# Altium PCB Шувалова.pcbdoc
Units mm, origin at the board's own origin, x right, y up, seen from the top; angles counter-clockwise.
Board outline 43.75 x 58.75 mm, 2 copper layers (Top Layer, Bottom Layer); 32 components, 20 nets, 153 pads, 30 vias.
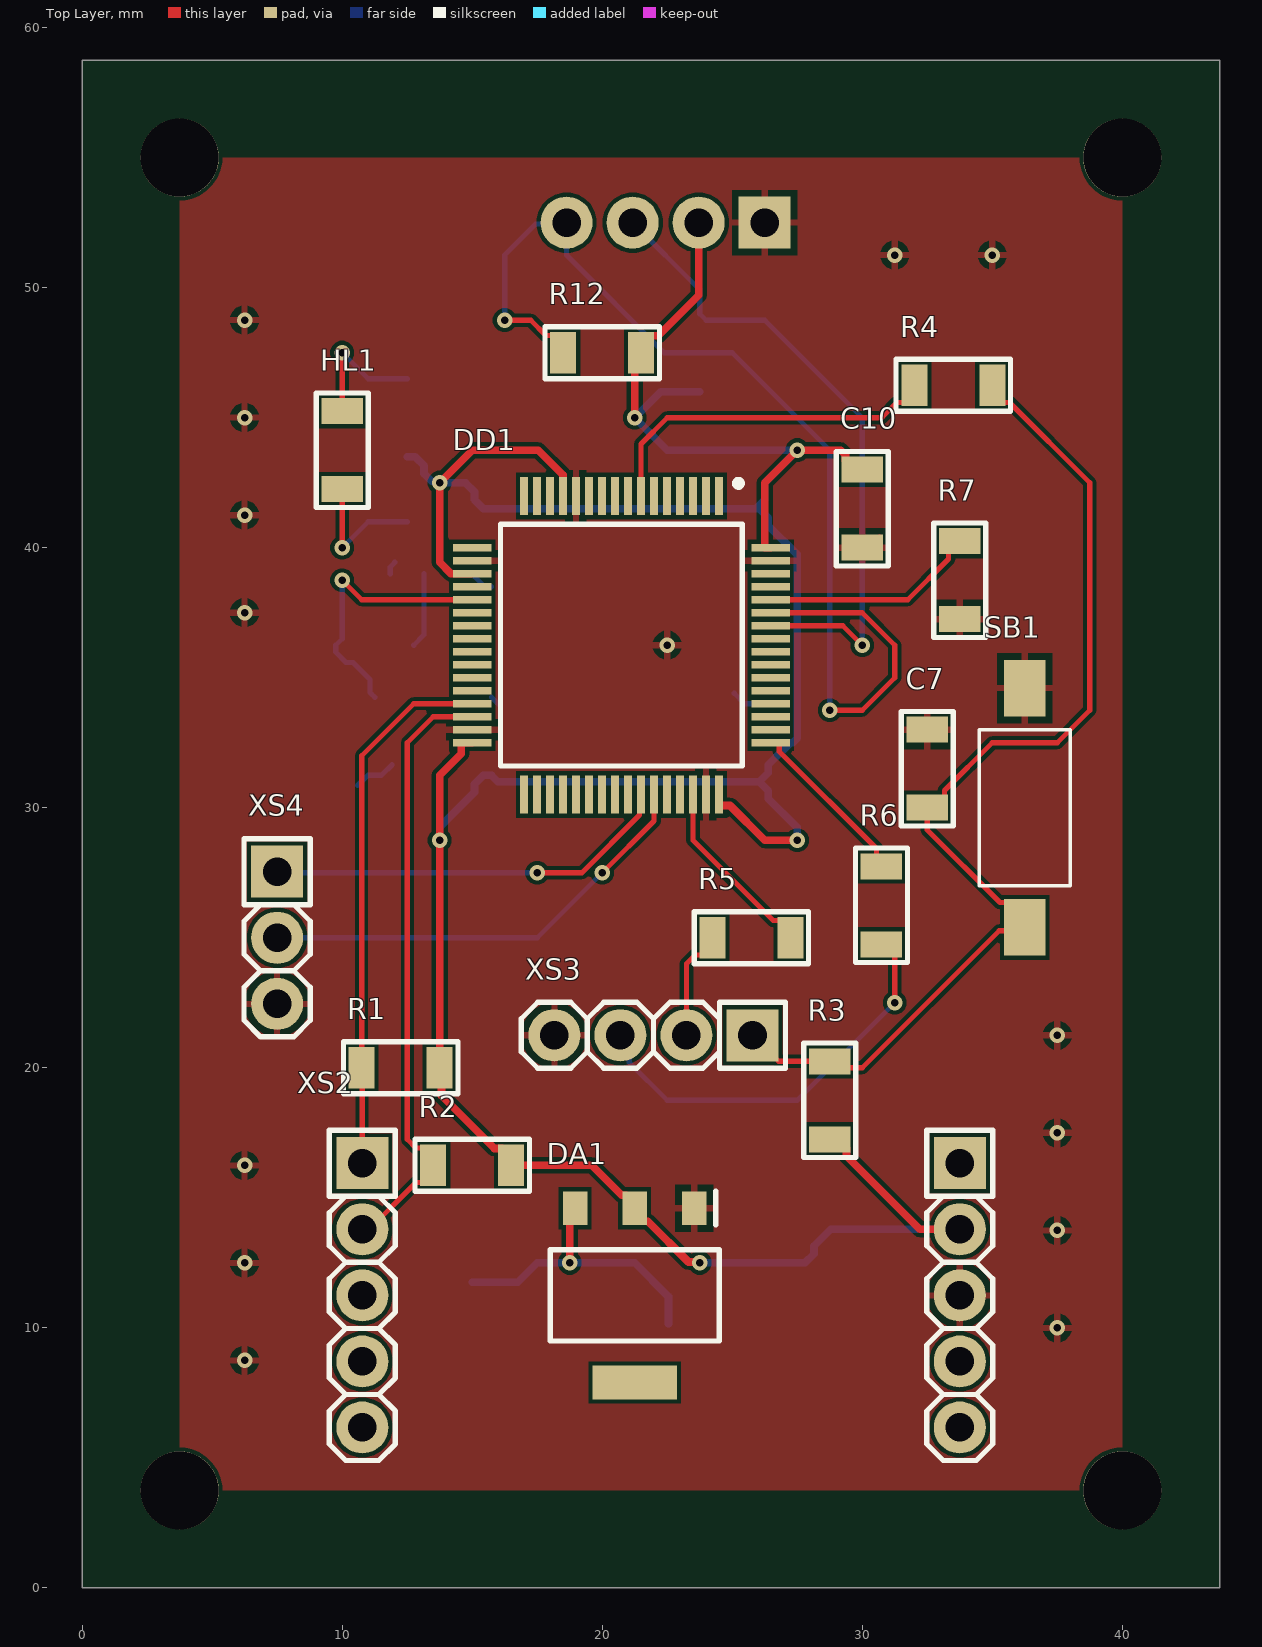
[diagram p0: Top Layer view]
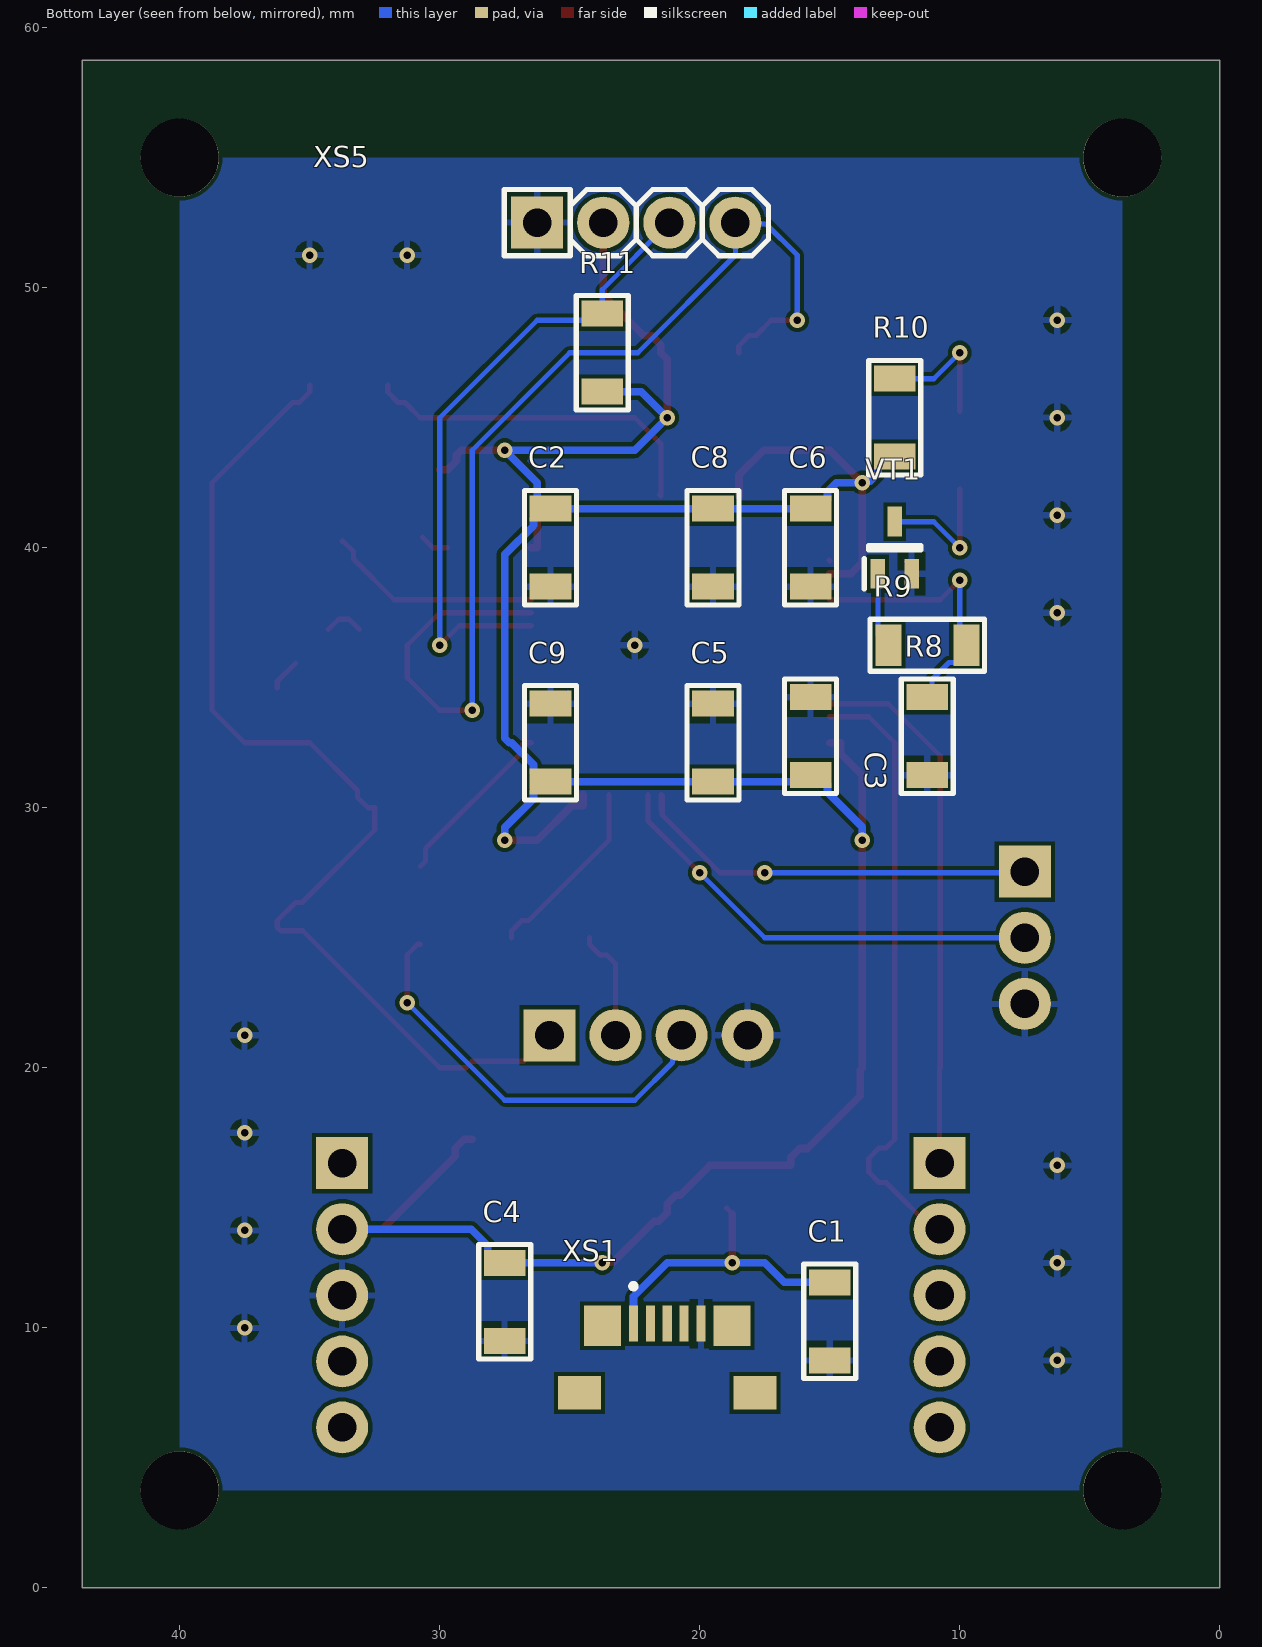
[diagram p1: Bottom Layer view, seen from below]
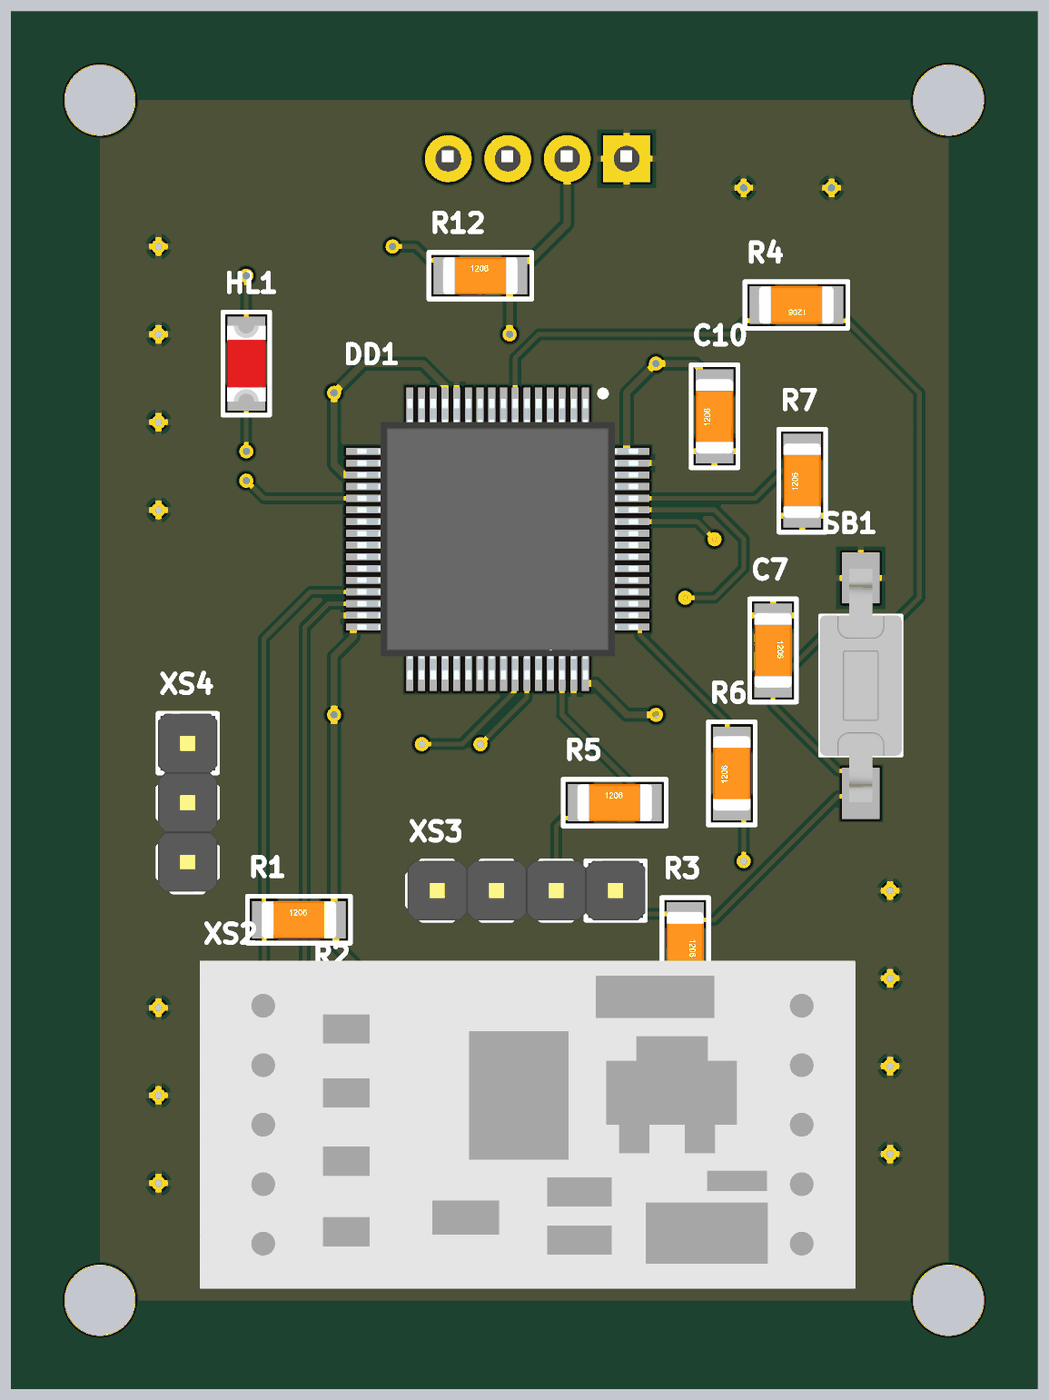
[diagram p2: 3D render of the assembled board from above, using the file's embedded part models]
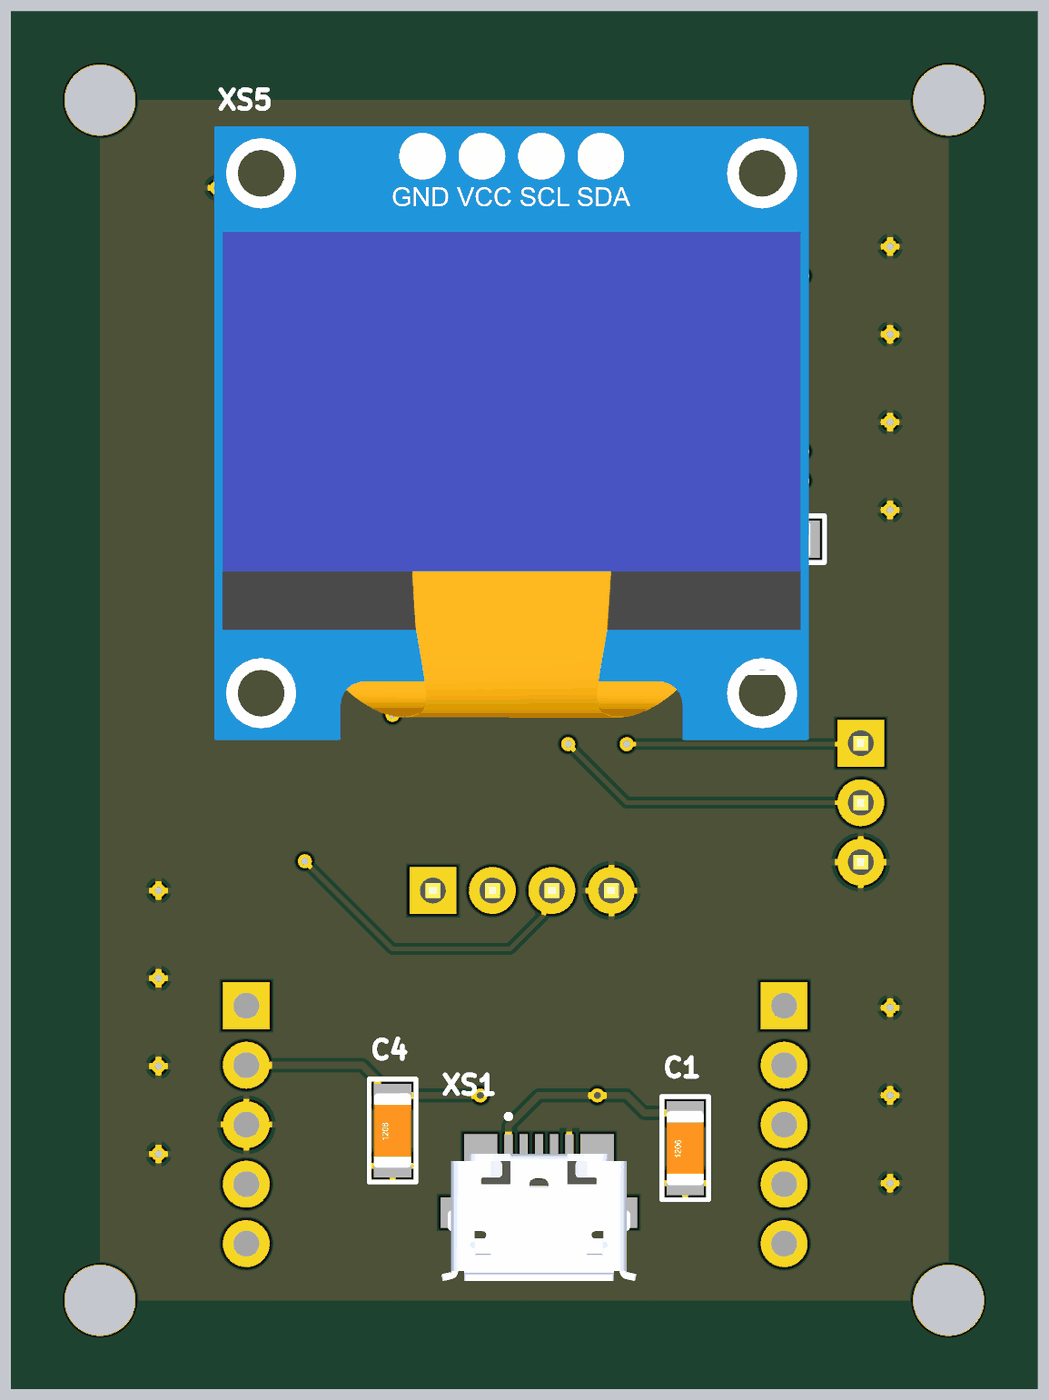
[diagram p3: 3D render of the assembled board from below, using the file's embedded part models]

## Layer stack, top to bottom
Top Solder: solder mask 0.0102, Solder Resist, Dk 3.5
Top Layer: signal copper 0.0356
Dielectric 1: dielectric 0.32, FR-4, Dk 4.8
Bottom Layer: signal copper 0.0356
Bottom Solder: solder mask 0.0102, Solder Resist, Dk 3.5

## Board outline
0,0 43.75,0 43.75,58.75 0,58.75

## Design rules (kind name [scope] priority, off if disabled: settings)
Clearance [All] p1: gap=0.15 ignorepadtopadclearanceinfootprint=TRUE
PolygonConnect [All] p1: thpad.connectstyle=Relief thpad.reliefconductorwidth=0.254 thpad.reliefentries=4 thpad.polygonreliefangle="90 Angle" thpad.airgapwidth=0.254 smdpad.connectstyle=Relief smdpad.reliefconductorwidth=0.254 smdpad.reliefentries=4 smdpad.polygonreliefangle="90 Angle" smdpad.airgapwidth=0.254 via.connectstyle=Direct via.reliefconductorwidth=0.254 via.reliefentries=4 via.polygonreliefangle="90 Angle" via.airgapwidth=0.254
RoutingVias [All] p1: holewidth=0.3 width=0.6 viastyle="Through Hole" minholewidth=0.3 minwidth=0.6 maxholewidth=0.3 maxwidth=0.6
SolderMaskExpansion [All] p1: expansion=0.102 istentingtop=FALSE
UnRoutedNet [All] p1: checkbadconnections=TRUE
Width [All] p1: maxlimit=0.5 minlimit=0.15 preferedwidth=0.2
29 further rules are at their usual default settings.

## Components (designator, comment, footprint, x,y, rotation, side; value= is the part's Value field where it differs from the comment)
C1 "*" "CAP: 1206" 15,10.25 r90 bottom
C2 "C" "CAP: 1206" 25.738,40 r90 bottom
C3 "C" "CAP: 1206" 15.738,32.75 r270 bottom
C4 "*" "CAP: 1206" 27.5,11 r90 bottom
C5 "C" "CAP: 1206" 19.488,32.5 r270 bottom
C6 "C" "CAP: 1206" 15.738,40 r90 bottom
C7 "C" "CAP: 1206" 32.5,31.5 r270 top
C8 "C" "CAP: 1206" 19.488,40 r90 bottom
C9 "C" "CAP: 1206" 25.738,32.5 r270 bottom
C10 "C" "CAP: 1206" 30,41.5 r90 top
DA1 "AMS1117" AMS1117-3.3 21.25,11.25 r270 top
DD1 "STM32F103RBT6" STM32F103RBT6 20.738,36.25 r270 top net-tie
HL1 "LED" "LED: 1206" 10,43.75 r270 top
R1 "R" "CAP: 1206" 12.25,20 r0 top
R2 "R" "CAP: 1206" 15,16.25 r0 top
R3 "R" "CAP: 1206" 28.75,18.75 r270 top
R4 "R" "CAP: 1206" 33.5,46.25 r180 top
R5 "R" "CAP: 1206" 25.738,25 r0 top
R6 "R" "CAP: 1206" 30.738,26.25 r90 top
R7 "R" "CAP: 1206" 33.75,38.75 r90 top
R8 "R" "CAP: 1206" 11.25,32.75 r90 bottom
R9 "R" "CAP: 1206" 11.25,36.25 r0 bottom
R10 "R" "CAP: 1206" 12.5,45 r270 bottom
R11 "R" "CAP: 1206" 23.75,47.5 r270 bottom
R12 "R" "CAP: 1206" 20,47.5 r0 top
SB1 "Button" Button_1437566-3 36.25,30 r270 top
VT1 "BC847" VT 12.5,40 r90 bottom
XS1 "" "USB B 47346-0001" 21.25,7.5 r180 bottom
XS2 "" ADXL345 21.525,10.75 r0 top
XS3 "" "CON: PLS-4" 21.968,21.25 r180 top
XS4 "" "CON: PLS-3" 7.5,25 r270 top
XS5 "" ssd1306 22.44,52.5 r180 bottom

## Footprints (in the part's own frame and the unit in brackets; to place one, negate y for a bottom-side part, rotate by r counter-clockwise, add the part's x,y. Pads: shape width x height; smd on the part's side, far side on the other; paste and mask are expansions set on the pad)
ADXL345 [mm]
  round 2 hole 1.1: 3V3(12.225,3.04) CS(12.225,-4.58) GND(12.225,0.5) IN1(-10.75,-4.58) IN2(-10.75,-2.04) SDA(-10.75,3.04) SDO(-10.75,0.5) VS(12.225,-2.04)
  rect 2x2 hole 1.1: 5V(12.225,5.58) SCL(-10.75,5.58)
  silkscreen extent -12.02,-5.85 13.49,6.85, body extent -13.5,-6.5 14.5,7.5, height 6
AMS1117-3.3 [mm]
  rect 1.3x0.95 smd: 1(-3.35,2.29) 2(-3.35,0) 3(-3.35,-2.29)
  rect 1.3x3.25 smd: 4(3.35,0)
  silkscreen extent -4,-3.25 1.75,3.25, body extent -3.5,-3.25 3.5,3.25, height 1.8
Button_1437566-3 [mm]
  rect 2.18x1.6 smd: 1(-4.6,0) 2(4.6,0)
  silkscreen extent -3,-1.75 3,1.75, body extent -4.98,-1.75 4.98,1.75, height 4.4
"CAP: 1206" [mm]
  rect 1x1.6 smd: 1(-1.5,0) 2(1.5,0)
  silkscreen extent -2.2,-1 2.2,1, body extent -1.6,-0.8 1.6,0.8, height 1
"CON: PLS-3" [mm]
  round 2 hole 1.1: GND(2.54,0) RXD(0,0)
  rect 2x2 hole 1.1: TXD(-2.54,0)
  silkscreen extent -3.81,-1.27 3.81,1.27, body extent -3.81,-1.27 3.81,1.27, height 8.54
"CON: PLS-4" [mm] "PLS-40 4 pin header"
  round 2 hole 1.1: GND(3.81,0) SWCLK(1.27,0) SWDIO(-1.27,0)
  rect 2x2 hole 1.1: NRST(-3.81,0)
  silkscreen extent -5.08,-1.27 5.08,1.27, body extent -5.08,-1.27 5.08,1.27, height 8.54
"LED: 1206" [mm]
  rect 1x1.6 smd: 1(-1.5,0) 2(1.5,0)
  silkscreen extent -2.2,-1 2.2,1, body extent -1.64,-0.82 1.64,0.82, height 0.9
ssd1306 [mm] "PLS-40 4 pin header"
  rect 2x2 hole 1.1: GND(-3.81,0)
  round 2 hole 1.1: SCL(1.27,0) SDA(3.81,0) VCC(-1.27,0)
  silkscreen extent -5.08,-1.27 5.08,1.27, body extent -12.68,-24.83 12.72,1.37, height 6.3
STM32F103RBT6 [mm]
  rect 1.475x0.3 smd: 1(-5.738,3.75) 2(-5.738,3.25) 3(-5.738,2.75) 4(-5.738,2.25) 5(-5.738,1.75) 6(-5.738,1.25) 7(-5.738,0.75) 8(-5.738,0.25) 9(-5.738,-0.25) 10(-5.738,-0.75) 11(-5.738,-1.25) 12(-5.738,-1.75) 13(-5.738,-2.25) 14(-5.738,-2.75) 15(-5.738,-3.25) 16(-5.738,-3.75) 33(5.738,-3.75) 34(5.738,-3.25) 35(5.738,-2.75) 36(5.738,-2.25) 37(5.738,-1.75) 38(5.738,-1.25) 39(5.738,-0.75) 40(5.738,-0.25) 41(5.738,0.25) 42(5.738,0.75) 43(5.738,1.25) 44(5.738,1.75) 45(5.738,2.25) 46(5.738,2.75) 47(5.738,3.25) 48(5.738,3.75)
  rect 0.3x1.475 smd: 17(-3.75,-5.738) 18(-3.25,-5.738) 19(-2.75,-5.738) 20(-2.25,-5.738) 21(-1.75,-5.738) 22(-1.25,-5.738) 23(-0.75,-5.738) 24(-0.25,-5.738) 25(0.25,-5.738) 26(0.75,-5.738) 27(1.25,-5.738) 28(1.75,-5.738) 29(2.25,-5.738) 30(2.75,-5.738) 31(3.25,-5.738) 32(3.75,-5.738) 49(3.75,5.738) 50(3.25,5.738) 51(2.75,5.738) 52(2.25,5.738) 53(1.75,5.738) 54(1.25,5.738) 55(0.75,5.738) 56(0.25,5.738) 57(-0.25,5.738) 58(-0.75,5.738) 59(-1.25,5.738) 60(-1.75,5.738) 61(-2.25,5.738) 62(-2.75,5.738) 63(-3.25,5.738) 64(-3.75,5.738)
  silkscreen extent -6.35,-4.65 4.65,4.65, body extent -6,-6 6,6, height 1.6
"USB B 47346-0001" [mm]
  rect 0.35x1.38 smd: 1(-1.3,2.66) 4(0.65,2.66) 5(1.3,2.66) D+(0,2.66) D-(-0.65,2.66)
  rect 1.425x1.55 smd: S1(-2.488,2.575) S2(2.488,2.575)
  rect 1.65x1.3 smd: S3(-3.375,0) S4(3.375,0)
  silkscreen extent -1.4,4 -1.2,4.2, body extent -4.18,-2.93 4.18,2.5, height 2.7
VT [mm]
  rect 1.15x0.55 smd: 1(-1,0.65) 2(-1,-0.65) 3(1,0)
  silkscreen extent -1.58,-1 0.08,1.17, body extent -1.1,-1 1.1,1, height 1

## Part data
C1 C4: library part "C Polar"
XS1: library part USB-B, Txt1=+5V, Txt2=GND
XS2: library part ADXL345, Txt1=VDD, Txt2=SCL, Txt3=SDA, Txt4=GND
XS3: library part STLINK, Txt1=NRST, Txt2=SWDIO, Txt3=SWCLK, Txt4=GND
XS4: library part UART, Txt1=TXD, Txt2=RXD, Txt3=GND
XS5: library part DISPLAY, Txt1=VCC, Txt2=SDA, Txt3=SCL, Txt4=GND

## Free pads (board coordinates)
  round 3 hole 3: 1(3.75,55) 2(40,55) 3(3.75,3.75) 4(40,3.75)

## Via types
v1: diameter 0.6, hole 0.3, Top Layer to Bottom Layer, 30 vias

## Nets (pads, with @x,y where several pads share a name; then routed paths per layer and width w, separated by ;. In a path a pad name is that pad's centre, name@x,y a point inside that pad or via, vN(x,y) a via of type N, cw(c..) or ccw(c..) an arc to the next point about the centre after c; other vN are vias at no path point)
3V3: C2.2 C3.2 C4.2 C5.2 C6.2 C8.2 C9.2 C10.2 DA1.2 DD1.13 DD1.19 DD1.32 DD1.48 DD1.64 R1.2 R2.2 R3.2 R10.2 R11.2 R12.2 XS2.3V3 XS5.VCC | length 131.2
  Top Layer w0.3: DD1.32 14.576,32.5 14.576,32.076 13.75,31.25 v1(13.75,28.75) R1.2 13.824,19.926 13.824,18.926 15.85,16.9 16.15,16.9 16.5,16.55 R2.2 19.6,16.25 20.75,15.1 20.925,15.1 21.25,14.775 DA1.2 21.25,14.425 21.575,14.1 21.75,14.1 23.32,12.53 23.72,12.53 v1(23.75,12.5) ; DD1.19 14.188,39 13.75,39.438 v1(13.75,42.5) 15,43.75 17.538,43.75 18.488,42.8 DD1.13 ; v1(21.25,45) 21.25,47.25 R12.2 21.5,47.8 21.85,48.15 22.15,48.15 23.71,49.71 XS5.VCC ; DD1.48 24.488,30.088 24.912,30.088 26.25,28.75 v1(27.5,28.75) ; DD1.64 26.25,40 26.25,42.5 v1(27.5,43.75) 29.174,43.75 29.35,43.574 29.35,43.35 29.7,43 C10.2 ; R3.2 29.05,17.25 29.4,16.9 29.4,16.6 32.21,13.79 XS2.3V3
  Bottom Layer w0.3: R10.2 12.8,43.5 13.15,43.15 13.15,42.85 13.443,42.557 ; v1(13.75,28.75) 13.75,29.262 15.088,30.6 15.088,30.9 15.438,31.25 C3.2 15.988,31 C5.2 C9.2 C9.2@26.038,31 ; v1(13.75,42.5) 14.738,42.5 15.088,42.15 15.088,41.85 15.438,41.5 C6.2 C8.2 C2.2 C2.2@25.9,41.5 ; v1(23.75,12.5) C4.2 27.8,12.5 28.15,12.85 28.15,13.15 28.79,13.79 XS2.3V3 ; R11.2 22.25,46 v1(21.25,45) 22.5,43.75 v1(27.5,43.75) 26.25,42.5 26.25,41.85 C2.2@25.9,41.5 ; v1(27.5,28.75) 27.5,29.238 26.388,30.35 26.388,30.65 C9.2@26.038,31 ; C2.2@25.9,41.5 26.038,41.5 26.388,41.15 26.388,40.85 27.5,39.738 27.5,32.676 27.324,32.5 27.238,32.5 26.388,31.65 26.388,31.35 C9.2@26.038,31
GND: C1.1 C2.1 C3.1 C4.1 C5.1 C6.1 C7.1 C8.1 C9.1 C10.1 DA1.1 DD1.12 DD1.18 DD1.31 DD1.47 DD1.63 R7.1 R8.1 SB1.1 VT1.2 XS1.5 XS2.GND XS3.GND XS4.GND XS5.GND | length 8.1
  Top Layer w0.2: DD1.18 DD1.18@15.024,39.524 ; C10.1@29.7,40 C10.1 30.262,40 C10.1@30.662,40.4 ; R7.1@33.088,36.85 33.488,37.25 R7.1 33.883,37.25 R7.1@34.283,36.85 ; SB1.1@35.55,35.557 36.25,34.857 SB1.1
  Bottom Layer w0.2: R8.1@10.588,30.85 10.988,31.25 R8.1 11.512,31.25 R8.1@11.912,31.65 ; VT1.2 11.85,39.262 VT1.2@12.025,39.437 ; C6.1@15.076,38.9 15.476,38.5 C6.1 ; C3.1 C3.1@15.988,34 ; C9.1@25.076,34.4 25.476,34 C9.1
  other v1: 6.25,8.75 37.5,10 6.25,12.5 37.5,13.75 6.25,16.25 37.5,17.5 37.5,21.25 22.5,36.25 6.25,37.5 6.25,41.25 6.25,45 6.25,48.75 31.25,51.25 35,51.25
NetC1_2: C1.2 DA1.3 XS1.1 | length 11.6
  Top Layer w0.2: DA1.3@18.75,14.39 DA1.3
  Top Layer w0.3: v1(18.75,12.5) DA1.3@18.75,14.39
  Bottom Layer w0.3: C1.2 16.75,11.75 17.5,12.5 v1(18.75,12.5) 21.25,12.5 22.55,11.2 XS1.1
NetC7_2: C7.2 R3.1 R4.1 SB1.2 XS3.NRST | length 41.7
  Top Layer w0.2: XS3.NRST 26.778,20.25 R3.1 29,20 30,20 35.267,25.267 36.117,25.267 SB1.2 36.25,25.657 35.55,26.357 35.293,26.357 32.5,29.15 C7.2 32.762,30 33.162,30.4 33.162,30.662 35,32.5 37.5,32.5 38.75,33.75 38.75,42.5 35.662,45.588 35.4,45.588 35,45.988 R4.1
NetDD1_7: DD1.7 R4.2 | length 13.7
  Top Layer w0.2: DD1.7@21.538,42.038 DD1.7 21.488,43.988 22.5,45 30.75,45 31.338,45.588 31.6,45.588 32,45.988 R4.2
NetDD1_21: DD1.21 R8.2 R9.1 | length 10.7
  Top Layer w0.2: v1(10,38.75) 10.75,38 DD1.21
  Bottom Layer w0.2: v1(10,38.75) 10,36.5 R9.1 9.75,35.988 10.15,35.588 10.412,35.588 11.067,34.933 11.067,34.433 R8.2
NetDD1_29: DD1.29 R1.1 XS2.SCL | length 20.8
  Top Layer w0.2: XS2.SCL 10.775,19.975 R1.1 10.75,32 12.75,34 DD1.29
NetDD1_30: DD1.30 R2.1 XS2.SDA | length 23.6
  Top Layer w0.2: XS2.SDA 11.04,13.79 12.838,15.588 13.1,15.588 13.5,15.988 R2.1 13.5,16.512 13.1,16.912 12.838,16.912 12.5,17.25 12.5,32.5 13.5,33.5 DD1.30
NetDD1_42: DD1.42 XS4.TXD | length 16.3
  Top Layer w0.2: v1(17.5,27.5) 19.217,27.5 21.438,29.721 21.438,30.462 DD1.42 DD1.42@21.488,29.924
  Bottom Layer w0.2: XS4.TXD 7.54,27.5 v1(17.5,27.5)
NetDD1_43: DD1.43 XS4.RXD | length 17.4
  Top Layer w0.2: v1(20,27.5) 21.988,29.488 DD1.43
  Bottom Layer w0.2: XS4.RXD 17.5,25 v1(20,27.5)
NetDD1_46: DD1.46 R5.2 | length 7.2
  Top Layer w0.2: DD1.46 23.488,28.75 26.576,25.662 26.838,25.662 27.238,25.262 R5.2
NetDD1_49: DD1.49 R6.2 | length 6.7
  Top Layer w0.2: DD1.49 26.759,32.5 26.809,32.45 26.809,32.167 30.543,28.433 30.543,27.945 R6.2
NetDD1_58: DD1.58 R11.1 XS5.SCL | length 25.1
  Top Layer w0.2: DD1.58 29.25,37 v1(30,36.25)
  Bottom Layer w0.2: XS5.SCL 23.75,49.92 R11.1 24,48.75 26.25,48.75 30,45 v1(30,36.25)
NetDD1_59: DD1.59 R12.1 XS5.SDA | length 42.6
  Top Layer w0.2: v1(16.25,48.75) 17.25,48.75 17.838,48.162 18.1,48.162 18.5,47.762 R12.1 ; DD1.59 30,37.5 31.25,36.25 31.25,35 30,33.75 v1(28.75,33.75)
  Bottom Layer w0.2: v1@16.327,48.947 16.327,48.827 v1(16.25,48.75) 16.25,51.25 17.447,52.447 18.577,52.447 XS5.SDA 18.63,51.25 22.38,47.5 25,47.5 28.75,43.75 v1(28.75,33.75)
NetDD1_60: DD1.60 R7.2 | length 8.4
  Top Layer w0.2: DD1.60 31.75,38 33.317,39.567 33.317,39.85 33.717,40.25 R7.2
NetHL1_1: HL1.1 R10.1 | length 5.2
  Top Layer w0.2: HL1.1 v1(10,47.5)
  Bottom Layer w0.2: v1(10,47.5) 11,46.5 R10.1
NetHL1_2: HL1.2 VT1.3 | length 5.2
  Top Layer w0.2: v1(10,40) HL1.2
  Bottom Layer w0.2: v1(10,40) 11,41 VT1.3
NetR5_1: R5.1 XS3.SWDIO | length 4.3
  Top Layer w0.2: XS3.SWDIO 23.238,24 23.576,24.338 23.838,24.338 24.238,24.738 R5.1
NetR6_1: R6.1 XS3.SWCLK | length 16.1
  Top Layer w0.2: R6.1 30.85,24.75 31.25,24.35 v1(31.25,22.5)
  Bottom Layer w0.2: XS3.SWCLK 21.042,20.906 21.042,20.208 22.5,18.75 27.5,18.75 v1(31.25,22.5)
NetR9_2: R9.2 VT1.1 | length 2.9
  Bottom Layer w0.2: R9.2 13.15,36.65 VT1.1
pads on no net: DA1.4 DD1.1 DD1.2 DD1.3 DD1.4 DD1.5 DD1.6 DD1.8 DD1.9 DD1.10 DD1.11 DD1.14 DD1.15 DD1.16 DD1.17 DD1.20 DD1.22 DD1.23 DD1.24 DD1.25 DD1.26 DD1.27 DD1.28 DD1.33 DD1.34 DD1.35 DD1.36 DD1.37 DD1.38 DD1.39 DD1.40 DD1.41 DD1.44 DD1.45 DD1.50 DD1.51 DD1.52 DD1.53 DD1.54 DD1.55 DD1.56 DD1.57 DD1.61 DD1.62 XS1.4 XS1.D+ XS1.D- XS1.S1 XS1.S2 XS1.S3 XS1.S4 XS2.5V XS2.CS XS2.IN1 XS2.IN2 XS2.SDO XS2.VS

## Polygon pours and split planes (outlines as drawn)
GND on Bottom Layer "GND_L02_P001" (solid, pour order 1): 40,55 3.75,55 3.75,3.75 40,3.75
GND on Top Layer "GND_L01_P002" (solid, pour order 2): 3.75,55 40,55 40,3.75 3.75,3.75

## Silkscreen, mask and mechanical layers (free items; w line width, h text height)
Board:
  the board outline again, w0.1